# Altium PCB PCBpower.PcbDoc
Units mil, origin at the board's own origin, x right, y up, seen from the top; angles counter-clockwise.
Board outline 6000 x 4000 mil, 2 copper layers (Top Layer, Bottom Layer); 47 components, 19 nets, 112 pads, 16 vias.
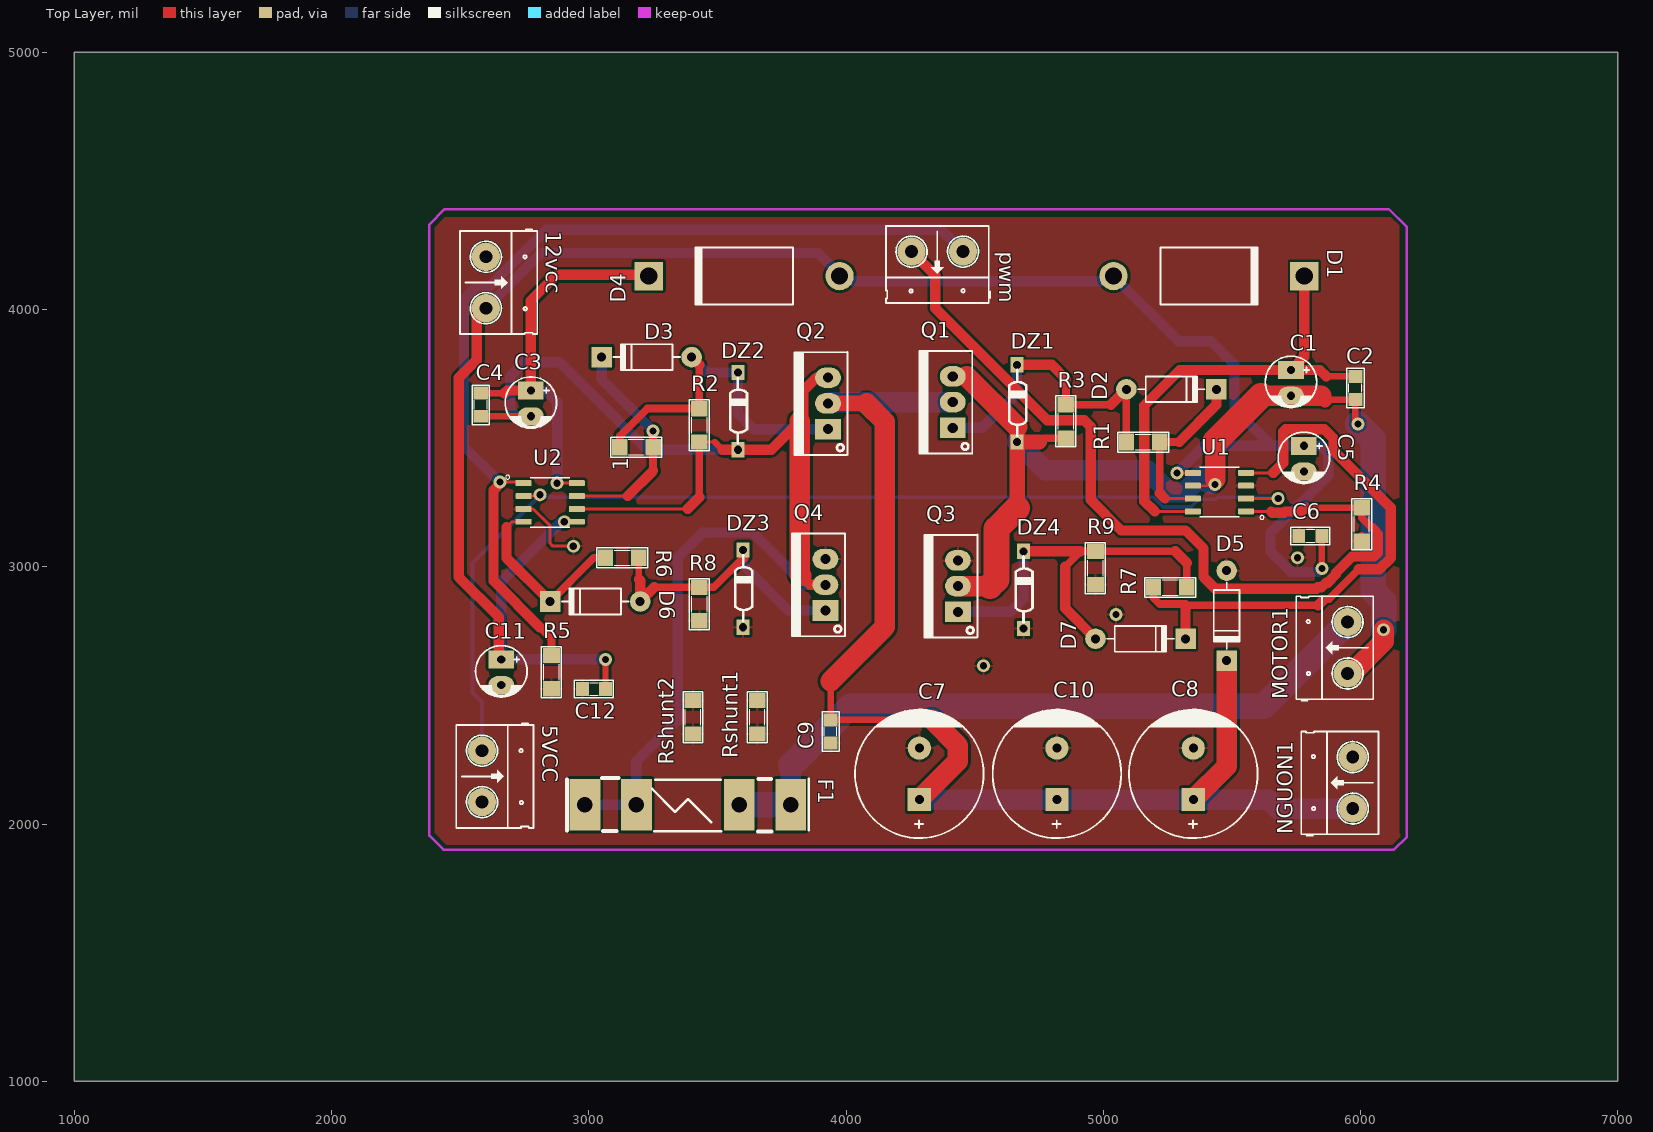
[diagram p0: Top Layer view]
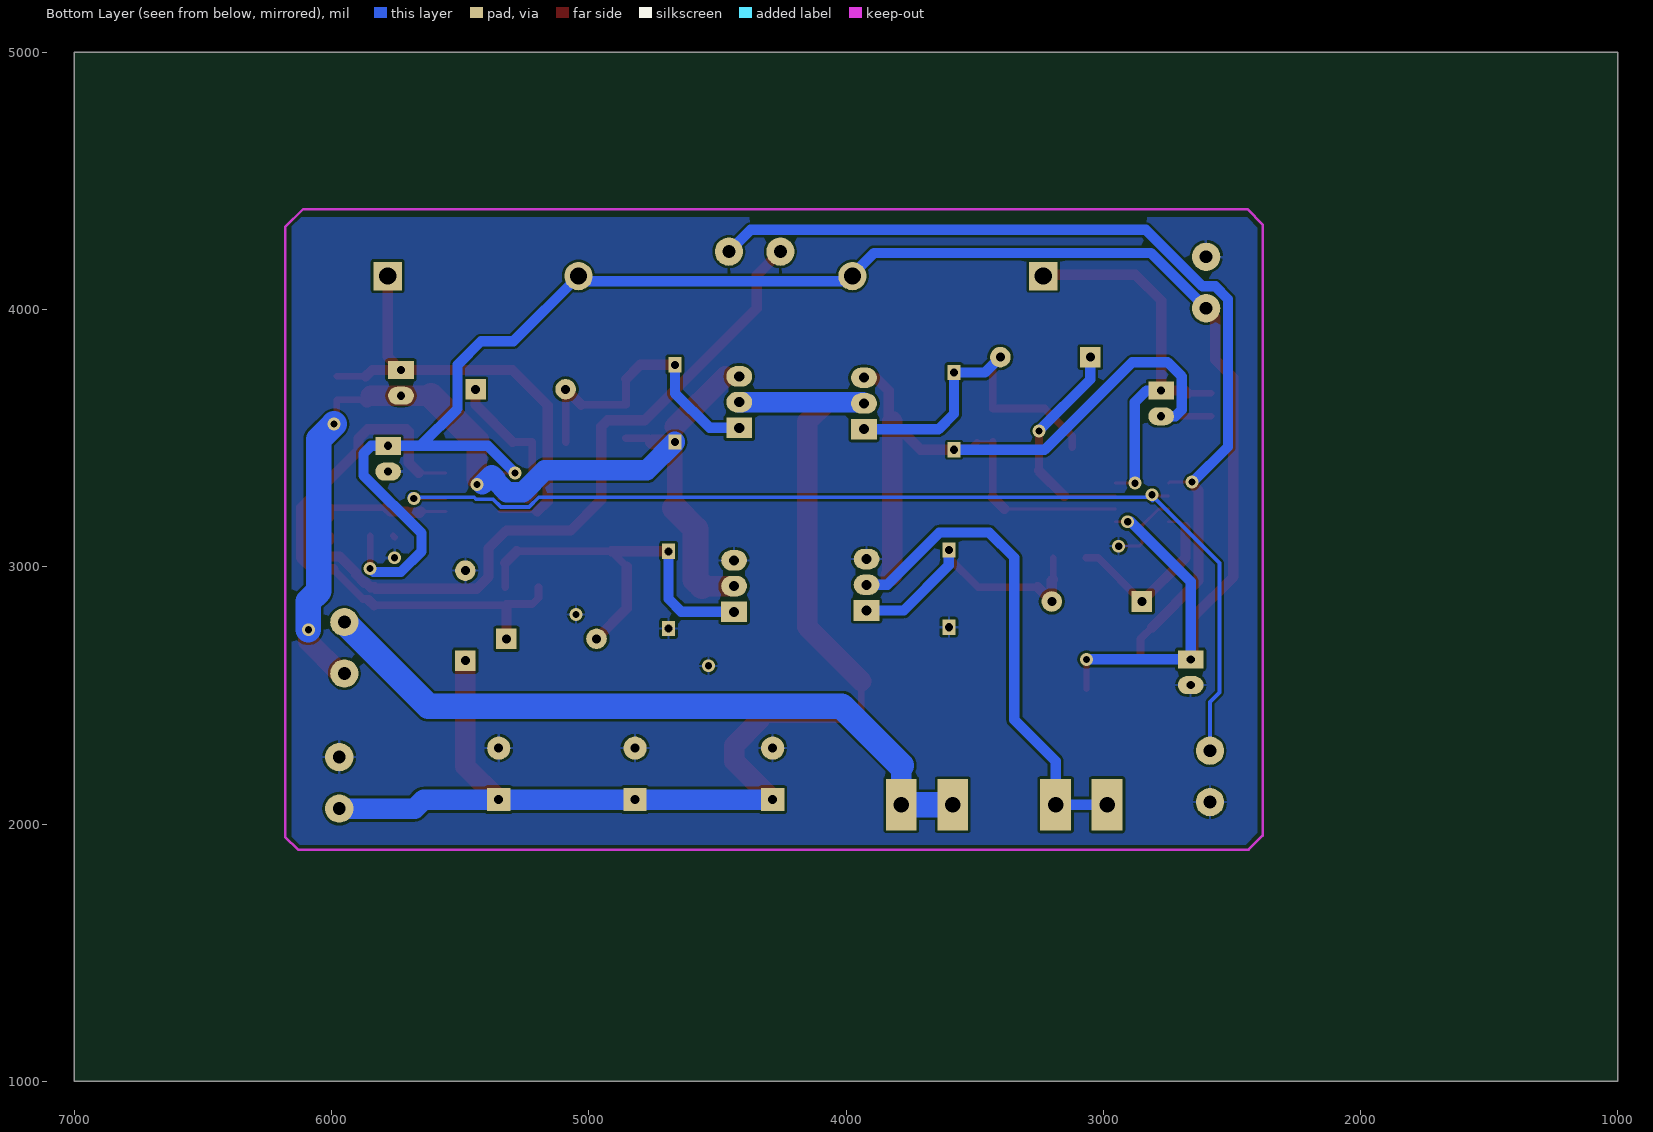
[diagram p1: Bottom Layer view, seen from below]
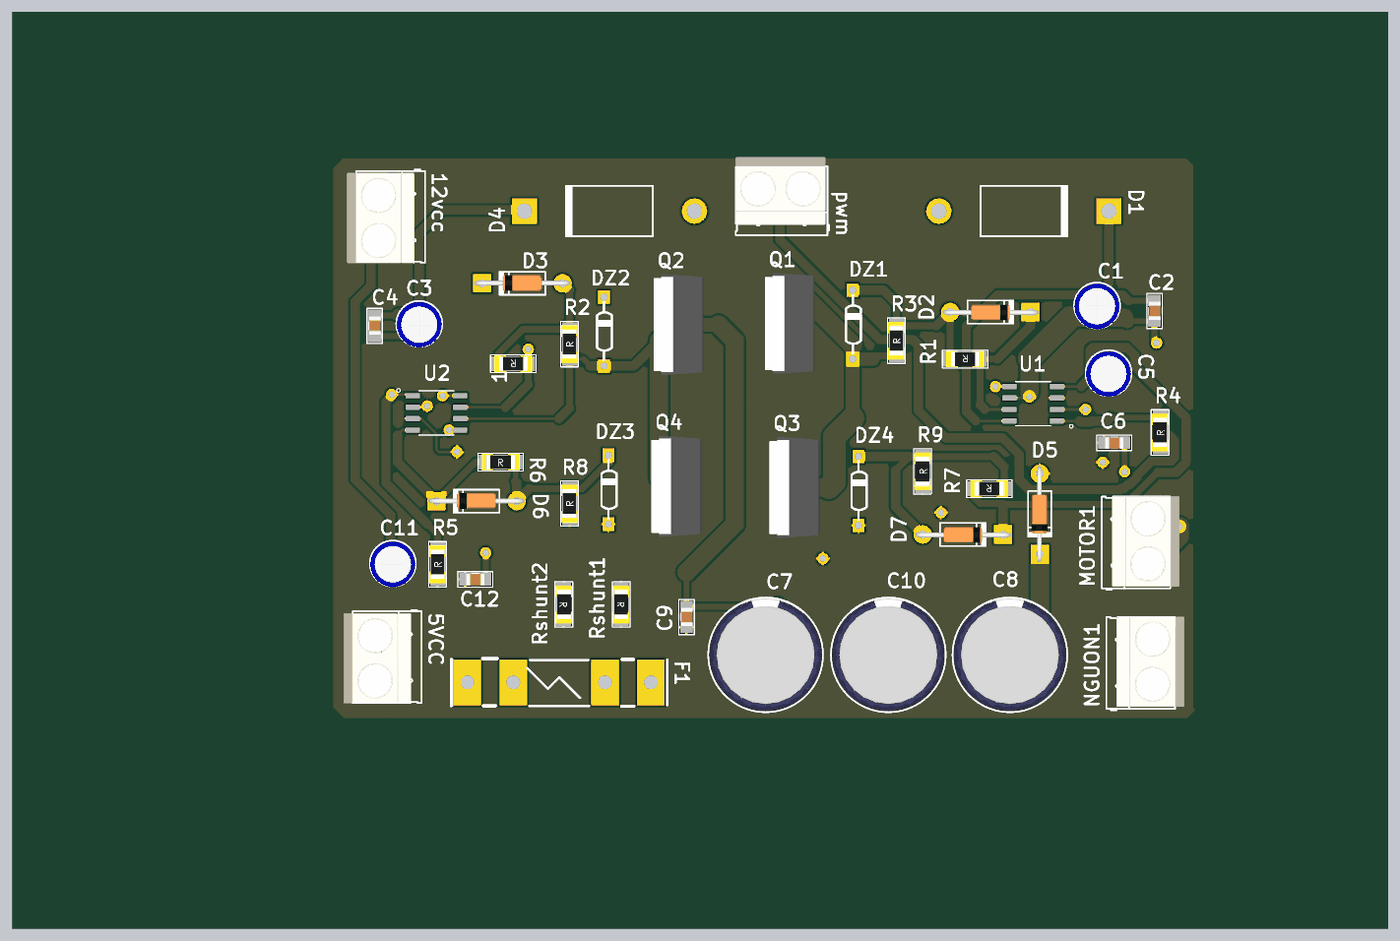
[diagram p2: 3D render of the assembled board from above, using the file's embedded part models]

## Layer stack, top to bottom
Top Solder: solder mask 0.4, Solder Resist, Dk 3.5
Top Layer: signal copper 1.4
Dielectric 1: dielectric 12.6, FR-4, Dk 4.8
Bottom Layer: signal copper 1.4
Bottom Solder: solder mask 0.4, Solder Resist, Dk 3.5

## Board outline
1000,1000 7000,1000 7000,5000 1000,5000

## Design rules (kind name [scope] priority, off if disabled: settings)
Clearance [All] p1: gap=10 ignorepadtopadclearanceinfootprint=FALSE except(0: Arc-Hole Track-Hole SMDPad-Hole THPad-Hole Via-Hole Fill-Hole Poly-Hole Region-Hole Text-Hole)
PolygonConnect [All] p1: connectstyle=Relief reliefconductorwidth=10 reliefentries=4 polygonreliefangle="90 Angle" airgapwidth=10
RoutingVias [All] p1: holewidth=28 width=50 viastyle="Through Hole" minholewidth=28 minwidth=50 maxholewidth=28 maxwidth=50
SMDNeckDown [All] p1: percent=50.000
SilkToSolderMaskClearance [IsText] p1: minsilkscreentomaskgap=10 clearancetoexposedcopper=TRUE
SolderMaskExpansion [All] p1: expansion=4
Width [All] p1: maxlimit=100 minlimit=10 preferedwidth=40
29 further rules are at their usual default settings.

## Components (designator, comment, footprint, x,y, rotation, side; value= is the part's Value field where it differs from the comment)
1 "10R" SM-1206 3185,3465 r180 top value="R1/4W - 1K"
5VCC "Header 2" HED2 2585,2285 r270 top
12vcc "Header 2" HED2 2600,4205 r270 top
C1 "10uF" CP1/2 5730,3765 r270 top value=10uF/50V
C2 "104" SM-0805 5980,3695 r90 top value=103
C3 "10uF" CP1/2 2775,3685 r270 top value=10uF/50V
C4 "104" SM-0805 2580,3630 r90 top value=103
C5 "10uF" CP1/2 5780,3470 r270 top value=10uF/50V
C6 "104" SM-0805 5805,3120 r0 top value=103
C7 "Cap Pol3" CP2/5 4285,2095 r90 top value=220uF/35V
C8 "Cap Pol3" CP2/5 5350,2095 r90 top value=220uF/35V
C9 "104" SM-0805 3940,2360 r90 top value=103
C10 "Cap Pol3" CP2/5 4820,2095 r90 top value=220uF/35V
C11 "10uF" CP1/2 2660,2640 r270 top value=10uF/50V
C12 "104" SM-0805 3020,2525 r0 top value=103
D1 "Diode 1N5408" DO-201AD 5410.87,4130 r0 top
D2 "1N4148" D1A 5090,3690 r180 top value=1N4007
D3 "1N4148" D1A 3400,3815 r0 top value=1N4007
D4 "Diode 1N5408" DO-201AD 3604.13,4130 r180 top
D5 "1N4007" D1A 5480,2985 r90 top
D6 "1N4148" D1A 3200,2865 r0 top value=1N4007
D7 "1N4148" D1A 4970,2720 r180 top value=1N4007
DZ1 "Diode Zener" DIODE/NOM/0.5A 4665,3485 r90 top
DZ2 "Diode Zener" DIODE/NOM/0.5A 3580,3455 r90 top
DZ3 "Diode Zener" DIODE/NOM/0.5A 3600,2765 r90 top
DZ4 "Diode Zener" DIODE/NOM/0.5A 4690,2760 r90 top
F1 "F1A" Fuse 3385,2075 r0 top value=Fuse
MOTOR1 "Header 2" HED2 5950,2585 r90 top
NGUON1 "Header 2" HED2 5970,2060 r90 top
pwm "Header 2" HED2 4455,4225 r180 top
Q1 "IRF540N" QTO-220 4415,3540 r90 top value=IRF840
Q2 "IRF540N" QTO-220 3930,3535 r90 top value=IRF840
Q3 "IRF540N" QTO-220 4435,2825 r90 top value=IRF840
Q4 "IRF540N" QTO-220 3920,2830 r90 top value=IRF840
R1 "10R" SM-1206 5155,3485 r180 top value="R1/4W - 1K"
R2 "4k7" SM-1206 3430,3550 r90 top value="R1/4W - 1K"
R3 "4k7" SM-1206 4855,3565 r90 top value="R1/4W - 1K"
R4 "10k" SM-1206 6005,3165 r90 top value="R1/4W - 1K"
R5 "10k" SM-1206 2855,2590 r90 top value="R1/4W - 1K"
R6 "10R" SM-1206 3130,3035 r0 top value="R1/4W - 1K"
R7 "10R" SM-1206 5260,2920 r180 top value="R1/4W - 1K"
R8 "4k7" SM-1206 3430,2855 r90 top value="R1/4W - 1K"
R9 "4k7" SM-1206 4970,2995 r90 top value="R1/4W - 1K"
Rshunt1 "0.1" SM-1206 3655,2415 r270 top value="R1/4W - 1K"
Rshunt2 "0.1" SM-1206 3405,2415 r270 top value="R1/4W - 1K"
U1 "IR2184" SOIC127P490X600X175-8N 5451.65,3290 r180 top
U2 "IR2184" SOIC127P490X600X175-8N 2850,3250 r0 top

## Footprints (in the part's own frame and the unit in brackets; to place one, negate y for a bottom-side part, rotate by r counter-clockwise, add the part's x,y. Pads: shape width x height; smd on the part's side, far side on the other; paste and mask are expansions set on the pad)
CP1/2 [mil] "Tu hoa < 22uF/16>50V"
  rect 70x100 hole 32: 1(0,0)
  oval 70x100 hole 32: 2(100,0)
  silkscreen extent -53,-100 146,100, body extent -49,-99 149,99, height 287
CP2/5 [mil] "Tu hoa 1000uF/25V,50V"
  rect 90x90 hole 35: 1(0,0)
  round 90 hole 35: 2(200,0)
  silkscreen extent -150,-250 350,250, body extent -147,-246 345,246, height 650
D1A [mil] "Diode 1A, W 100mil, L 350mil"
  round 80 hole 35: 1(0,0)
  rect 80x80 hole 35: 2(-350,0)
  silkscreen extent -305,-50 -45,50, body extent -386,-33 34,36, height 84
DIODE/NOM/0.5A [mm]
  rect 1.5x1.3 hole 0.8: 1(0,0) 2(7.62,0)
  silkscreen extent 0.64,-0.89 7.11,0.76
DO-201AD [mm] "Diode, Axial; Body 9.5 x 5.6 mm (LxDia. max), Lead Dia. 1.32 mm (max)"
  round 2.8 hole 1.7: 1(-9.42,0)
  rect 2.8x2.8 hole 1.7: 2(9.42,0)
  silkscreen extent -4.8,-2.8 4.9,2.8
Fuse [mil] "3A"
  rect 120x200 hole 60: 1(-400,0) 1(-200,0) 2(200,0) 2(400,0)
  silkscreen extent -469,-104 471,104, body extent -335,-100 335,105, height 100
HED2 [mil] "Header 2, 2 pin, hight 300mil, Pin to Pin 200, Colour Green"
  round 110 hole 50: 1(0,0) 2(200,0)
  silkscreen extent -106,-100 300,200, body extent -92,-140 302,155, height 394
QTO-220 [mil] "TO-220 - 1-2-3"
  rect 80x100 hole 39: 1(0,0)
  oval 80x100 hole 39: 2(100,0) 3(200,0)
  silkscreen extent -100,-76 300,130, body extent -121,-85 321,100, height 755
SM-0805 [mil] "Compoment SMD 80x50mil"
  rect 50x55 smd: 1(-45,0) 2(45,0)
  silkscreen extent -77,-34 76,33, body extent -40,-27 40,23, height 24
SM-1206 [mil] "Compoment SMD 120x60mil"
  rect 60x65 smd: 1(-65,0) 2(65,0)
  silkscreen extent -99,-38 99,39, body extent -83,-35 83,36, height 25
SOIC127P490X600X175-8N [mm]
  rrect25% 1.58x0.59 smd: 1(-2.625,1.905) 2(-2.625,0.635) 3(-2.625,-0.635) 4(-2.625,-1.905) 5(2.625,-1.905) 6(2.625,-0.635) 7(2.625,0.635) 8(2.625,1.905)
  silkscreen extent -4.41,-2.45 1.95,2.69

## Part data
1 R1 R2 R3 R4 R5 R6 R7 R8 R9 Rshunt1 Rshunt2: library part R, "Resistor 1/4W"
5VCC 12vcc MOTOR1 NGUON1 pwm: library part Hed2, "Header 2 (Green)"
C1 C3 C5 C11: library part CP1, "Cap P  0,1uF < 22uF , 16 - 50V", Description 1="10 => 220uF/6,3V/10V - 10uF => 100uF/16V", Description 2="0,1uF => 33uF/50V - 10uF => 22uF/63V", Description 3="0,47uF => 10uF/100V"
C2 C4 C6 C9 C12: library part CM, "Cap SMD"
C7 C8 C10: "Polarized Capacitor (Surface Mount)", LatestRevisionDate=17-Jul-2002, LatestRevisionNote="Re-released for DXP Platform.", PackageReference=C0805, Publisher="Altium Limited"
D1 D4: "3 Amp Medium Power Silicon Rectifier Diode", ComponentLink1Description="Manufacturer Link", ComponentLink1URL=http://www.irf.com/, DatasheetVersion=Aug-1984, LatestRevisionDate=17-Jul-2002, LatestRevisionNote="Re-released for DXP Platform.", PackageDescription="Diode, Axial; Body 9.5 x 5.3 mm (LxDia. max), Lead Dia. 1.32 mm (max)", PackageReference=DO-201AD, Published=8-Jun-2000, Publisher="Altium Limited"
D2 D3 D5 D6 D7: library part D1A, "Diode 1A"
DZ1 DZ2 DZ3 DZ4: "Zener Diode", LatestRevisionDate=17-Jul-2002, LatestRevisionNote="Re-released for DXP Platform.", PackageReference=DIODE-0.7, Published=8-Jun-2000, Publisher="Altium Limited"
F1: library part Fuse, "Fuse", Designed by=VanDungEvn
Q1 Q2 Q3 Q4: library part IRF840, "MOSFET N - CHANNEL 500V - 0.75 - 8A - TO-220"
U1 U2: "Half-Bridge Driver"

## Via types
v1: diameter 50, hole 28, Top Layer to Bottom Layer, 16 vias

## Nets (pads, with @x,y where several pads share a name; then routed paths per layer and width w, separated by ;. In a path a pad name is that pad's centre, name@x,y a point inside that pad or via, vN(x,y) a via of type N, cw(c..) or ccw(c..) an arc to the next point about the centre after c; other vN are vias at no path point)
5V: 5VCC.1 U1.2 U2.2 | length 4252.2
  Top Layer w11: U2.2 2805,3275 v1(2810,3280)
  Top Layer w11.5: U1.2 v1(5680,3265)
  Top Layer w11.61: v1@2808,3258 2810,3260 v1(2810,3280)
  Bottom Layer w15: 5VCC.1 2585,2474 2548,2511 2548,3015 2810,3277 v1(2810,3280) ; v1@2808,3258 2820,3270 5194.62,3270 5232.12,3232.5 5341.88,3232.5 5371.88,3262.5 5437.82,3262.5 5445.32,3270 v1@5685,3270
  Bottom Layer w40: v1(5680,3265) v1@5685,3270
24V: C7.1 C8.1 C9.2 C10.1 D5.2 NGUON1.1 Q1.2 Q2.2 | length 5085.8
  Top Layer w25: 3940,2555 C9.2 4335,2405
  Top Layer w60: Q2.2 4080,3635
  Top Layer w80: 3940,2555 4151,2766 4151,3564 4080,3635 ; C7.1 4435,2245 4435,2305 4335,2405 ; C8.1 5480,2225 D5.2
  Bottom Layer w40: Q2.2 Q2.2@3935,3640
  Bottom Layer w80: Q2.2@3935,3640 Q1.2 ; C7.1 C10.1 C8.1 5642,2095 5677,2060 NGUON1.1
+12V: 12vcc.2 C5.1 C6.2 C11.1 C12.2 D1.1 D4.1 U1.5 U2.5 | length 7824.9
  Top Layer w11: v1(2905,3175) U2.5
  Top Layer w11.5: v1(5287,3365) U1.5
  Top Layer w25: C12.2 v1(3065,2640) ; v1(5850,2993) C6.2
  Top Layer w40: 12vcc.2 2565,3970 2565,3805 2495,3735 2495,2960 2650,2805 2650,2630 C11.1
  Bottom Layer w40: 12vcc.2 2815,4220 3890.87,4220 4000.87,4110 5020,4110 D1.1 5293.79,3876.21 5418.79,3876.21 5510,3785 5510,3615 5655,3470 ; v1(2905,3175) 2893,3175 2660,2942 C11.1 v1(3065,2640) ; v1(5287,3365) 5392,3470 5655,3470 ; v1(5850,2993) 5837,2980 5730,2980 5650,3060 5650,3130 5876,3356 5876,3440 5846,3470 C5.1 5655,3470
GND: 5VCC.2 12vcc.1 C5.2 C6.1 C7.2 C8.2 C9.1 C10.2 C11.2 C12.1 D5.1 DZ3.1 DZ4.1 NGUON1.2 Q3.3 Q4.3 R4.1 R5.1 R8.1 R9.1 Rshunt1.1 Rshunt1.2 Rshunt2.1 Rshunt2.2 U1.3 U2.3 | length 320.9
  Top Layer w11.4: 2850,3090 2850,3159
  Top Layer w11.5: U2.3 2784,3225 2850,3159 ; 2850,3090 2860,3080 v1(2940,3080)
  Top Layer w25: C6.1@5755,3115 C6.1
  Top Layer w30: R4.1 R4.1@6005,3120
  other v1: 4535,2615 5050,2815 5755,3035
M+: C1.2 C2.1 DZ1.1 MOTOR1.1 Q1.3 Q3.2 R3.1 U1.6 | length 4262
  Top Layer w11.5: U1.6 v1@5430,3315
  Top Layer w11.61: v1(5435,3320) v1@5435,3341
  Top Layer w15: v1@5430,3315 v1(5435,3320)
  Top Layer w25: 5862,3650 C2.1 v1@5980,3560
  Top Layer w30: 4752,3485 4767,3500 R3.1
  Top Layer w40: MOTOR1.1 MOTOR1.1@5965,2585
  Top Layer w60: Q1.3 4470,3740 ; 4665,3227 DZ1.1 ; 4665,3545 DZ1.1 ; 4752,3485 DZ1.1 ; 5847,3665 5862,3650
  Top Layer w80: Q3.2 4560,2925 ; 4470,3740 4665,3545 ; v1@5435,3341 5435,3487 ; 5613,3665 C1.2 5847,3665 ; MOTOR1.1@5965,2585 6090,2710 v1(6090,2755)
  Top Layer w100: 4560,2925 4585,2950 4585,3147 4665,3227 ; 5435,3487 5613,3665
  Bottom Layer w40: v1@5414,3320 v1(5435,3320)
  Bottom Layer w80: DZ1.1 4775,3375 5170.93,3375 5255.93,3290 5318.07,3290 5362,3333.93 5362,3341.01 5377.5,3356.5 v1@5414,3320
  Bottom Layer w100: v1(5990,3555) 6050,3495 6050,2905 6090,2865 v1(6090,2755)
M-: F1.2 MOTOR1.2 | length 2748.1
  Bottom Layer w80: F1.2@3785,2075 3785,2227
  Bottom Layer w100: F1.2@3585,2075 F1.2@3785,2075 ; 3785,2227 4016,2458 5623,2458 MOTOR1.2
Net1_1: 1.1 D3.2 U2.7 | length 861.5
  Top Layer w11: U2.7 3151,3275
  Top Layer w30: 3250,3374 1.1 v1(3250,3528)
  Top Layer w40: 3151,3275 3250,3374
  Bottom Layer w40: D3.2 3050,3728 v1(3250,3528)
Net1_2: 1.2 D3.1 DZ2.2 Q2.1 R2.2 | length 1349.5
  Top Layer w30: 1.2 3120,3508 3227,3615 R2.2 3430,3785
  Top Layer w40: D3.1 3430,3785
  Bottom Layer w40: D3.1 3460,3755 DZ2.2 3580,3595 3640,3535 Q2.1
NetC1_1: C1.1 C2.2 D1.2 U1.8 | length 1850.8
  Top Layer w11.5: 5200,3215 U1.8
  Top Layer w25: 5867,3740 C2.2
  Top Layer w40: 5200,3215 5160,3255 5160,3627 5298,3765 C1.1 ; D1.2 5781.73,3816.73 C1.1 ; 5867,3740 5842,3765 C1.1
NetC3_1: C3.1 C4.2 D4.2 U2.8 | length 1547
  Top Layer w11.5: v1(2877,3325) U2.8
  Top Layer w25: C4.2 2672,3675
  Top Layer w40: 2672,3675 2682,3685 C3.1 2775,4035 2875,4135 3184.13,4135 D4.2@3209.13,4160
  Bottom Layer w40: C3.1 2832,3685 2877,3640 v1(2877,3325)
NetC3_2: C3.2 C4.1 DZ2.1 F1.1 Q2.3 Q4.2 R2.1 U2.6 | length 5491.9
  Top Layer w11.5: U2.6 3385,3225 ; R2.1 3490,3485
  Top Layer w25: C4.1 C3.2 ; 3490,3485 3520,3455
  Top Layer w30: 3430,3270 R2.1
  Top Layer w40: 3385,3225 3430,3270 ; 3520,3455 DZ2.1 3710,3455 3820,3565 ; 3825,2965 3860,2930 Q4.2 ; 3834,3569 3834,3684 3885,3735 Q2.3
  Top Layer w80: 3820,3565 3820,2970 3825,2965
  Bottom Layer w40: C3.2 2720,3585 2695,3610 2695,3740 2750,3795 2888,3795 3228,3455 DZ2.1 ; F1.1@2985,2075 3185,2075 3185,2244 3346,2405 3346,3036 3443,3133 3637,3133 3840,2930 Q4.2
NetD2_1: D2.1 DZ1.2 Q1.1 R1.2 R3.2 | length 1193.6
  Top Layer w30: 4855,3730 R3.2 5030,3630 ; R1.2 D2.1
  Top Layer w40: DZ1.2 4800,3785 4855,3730 ; 5030,3630 D2.1
  Bottom Layer w40: Q1.1 4530,3540 4665,3675 DZ1.2
NetD2_2: D2.2 R1.1 U1.7 | length 676.7
  Top Layer w11.5: 5240,3265 U1.7
  Top Layer w30: 5220,3285 R1.1 5295,3485
  Top Layer w40: 5220,3285 5240,3265 ; 5295,3485 5440,3630 D2.2
NetD6_1: D6.1 DZ3.2 Q4.1 R6.2 R8.2 | length 1125.3
  Top Layer w25: 3195,2952 R6.2
  Top Layer w30: 3255,2920 R8.2 3486,2920 3600,3034
  Top Layer w40: 3195,2952 3200,2947 D6.1 3255,2920 ; 3600,3034 DZ3.2
  Bottom Layer w40: DZ3.2 3600,3005.47 3775.47,2830 Q4.1
NetD6_2: D6.2 R6.1 U2.4 | length 719.9
  Top Layer w11.5: 2701.41,3175 U2.4
  Top Layer w11.61: 2680,3153.59 2701.41,3175
  Top Layer w30: D6.2 3020,3035 R6.1
  Top Layer w40: 2680,3153.59 2680,3035 D6.2
NetD7_1: D7.1 DZ4.2 Q3.1 R7.1 R9.2 | length 1623.1
  Top Layer w30: 4852,3000 4912,3060 R9.2 5280,3060 ; R7.1 5325,3015
  Top Layer w40: DZ4.2 4912,3060 ; 4852,3000 4852,2838 D7.1 ; 5280,3060 5325,3015
  Bottom Layer w40: Q3.1 4640,2825 4690,2875 DZ4.2
NetD7_2: D7.2 R7.2 U1.4 | length 2233.2
  Top Layer w11.5: U1.4 5661,3365
  Top Layer w30: R7.2 5195,2880 5220,2855 5320,2855 ; 5320,2850 5835,2850 ; 5855,2870 5860,2875 5878.64,2875 5993.64,2990
  Top Layer w40: D7.2 5320,2850 ; 5661,3365 5700,3404 5700,3525 5710,3535 5860,3535 5895,3500 5895,3452.5 6117.5,3230 6117.5,3033.79 6073.71,2990 5993.64,2990 ; 5835,2850 5855,2870
pwm1: pwm.1 R5.2 U2.1 | length 3729.3
  Top Layer w11.5: v1(2655,3330) 2741.65,3330 U2.1
  Top Layer w30: 2810,2765 2855,2720 R5.2
  Top Layer w40: v1(2655,3330) 2655,3323.19 2630,3298.19 2630,2945 2810,2765
  Bottom Layer w40: v1(2655,3330) 2651.81,3330 2515,3466.81 2515,4040.21 2564.79,4090 2614.29,4090 2834.29,4310 4370,4310 pwm.1
pwm2: pwm.2 R4.2 U1.1 | length 3389.9
  Top Layer w11.5: U1.1 5652.22,3215
  Top Layer w25: 5787,3230 R4.2
  Top Layer w30: R4.2 6005,3190 6040,3155 6047.86,3155 6062.5,3140.36 6062.5,3132.5 6067.5,3127.5
  Top Layer w40: pwm.2 4347,4133 4347,4005.46 4782.46,3570 4926,3570 4951,3545 4951,3260 5070,3141 5320,3141 5390,3071 5390,2960 5435,2915 5829.29,2915 5834.29,2920 5847.93,2920 5865.93,2938 5872.78,2938 5905,2970.22 5905,2977.07 5967.93,3040 6053,3040 6067.5,3054.5 6067.5,3127.5 ; 5652.22,3215 5657.22,3210 5702.78,3210 5707.78,3215 5772,3215 5787,3230

## Polygon pours and split planes (outlines as drawn)
GND on Top Layer "AutoNaming" (solid, pour order 4): 2425,4365 6095,4365 6105,4375 6140,4340 6150,4340 6150,1965 6170,1945 6145,1920 2455,1920 2440,1905 2385,1960 2385,4300 2375,4310 2420,4355 2420,4375
GND on Bottom Layer "AutoNaming" (solid, pour order 8): 2430,4370 6130,4370 6170,4330 6170,1935 6145,1935 6110,1900 2430,1900 2430,1905 2385,1950 2385,4325

## Keep-outs
Keep-Out Layer:
  lines w10: 2380,1955 2380,4330 2440,4390 2455,4390 6110,4390 6180,4320 6180,1950 6130,1900 2435,1900 2380,1955